# Altium PCB PCB-vitor-project.PcbDoc
Units mil, origin at the board's own origin, x right, y up, seen from the top; angles counter-clockwise.
Board outline 3190 x 2265 mil, 2 copper layers (Top Layer, Bottom Layer); 43 components, 23 nets, 122 pads, 1 vias.
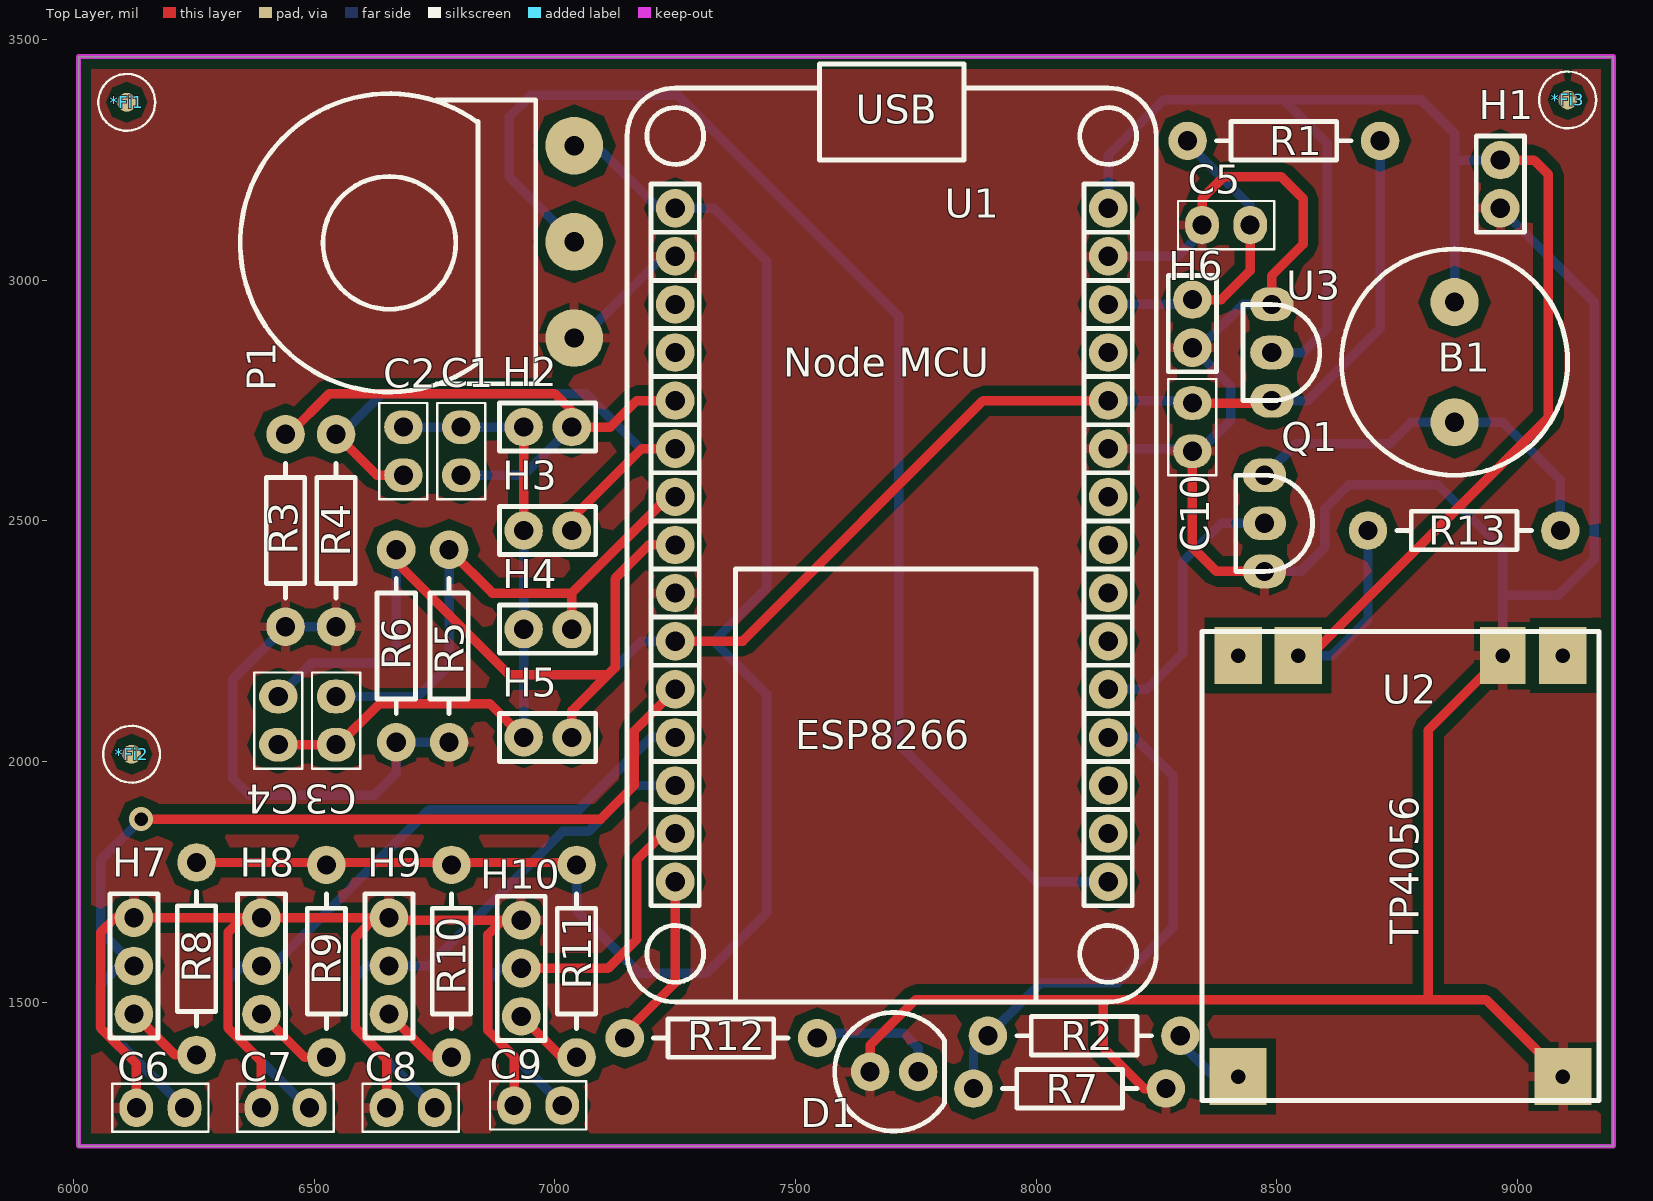
[diagram p0: Top Layer view]
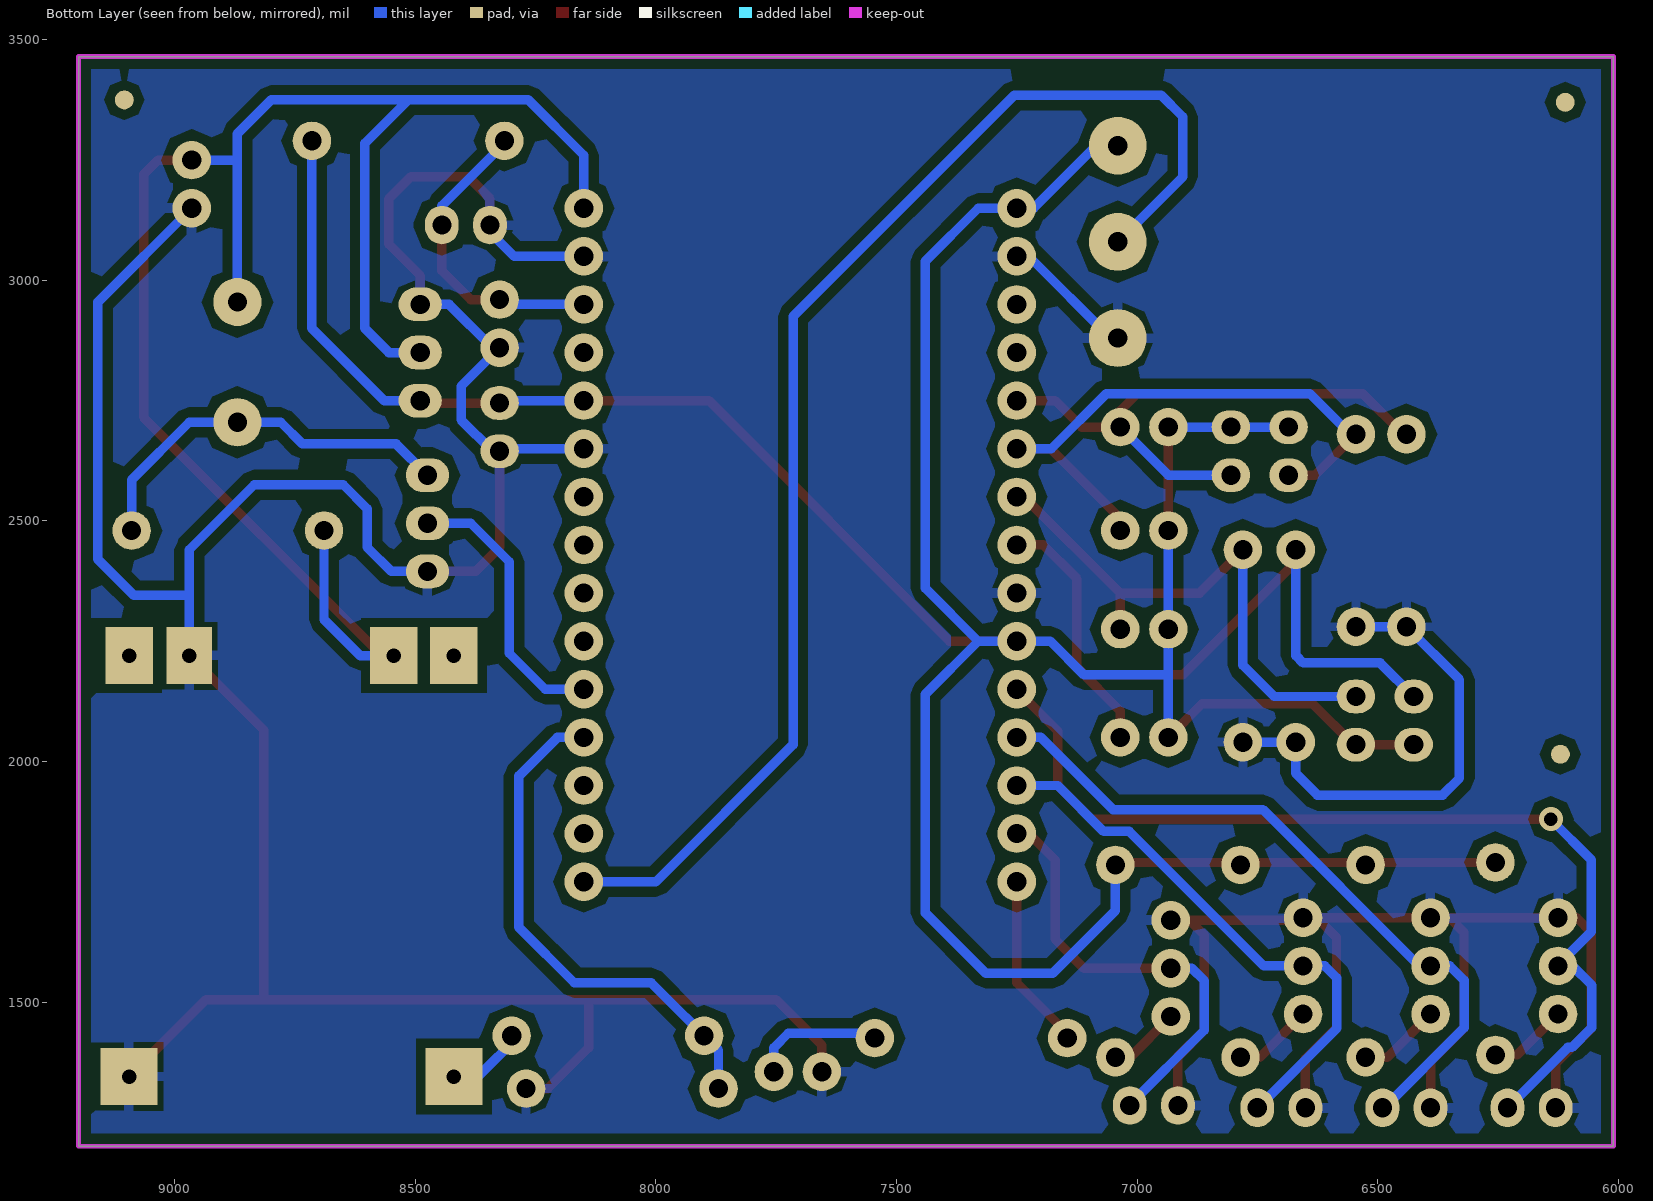
[diagram p1: Bottom Layer view, seen from below]
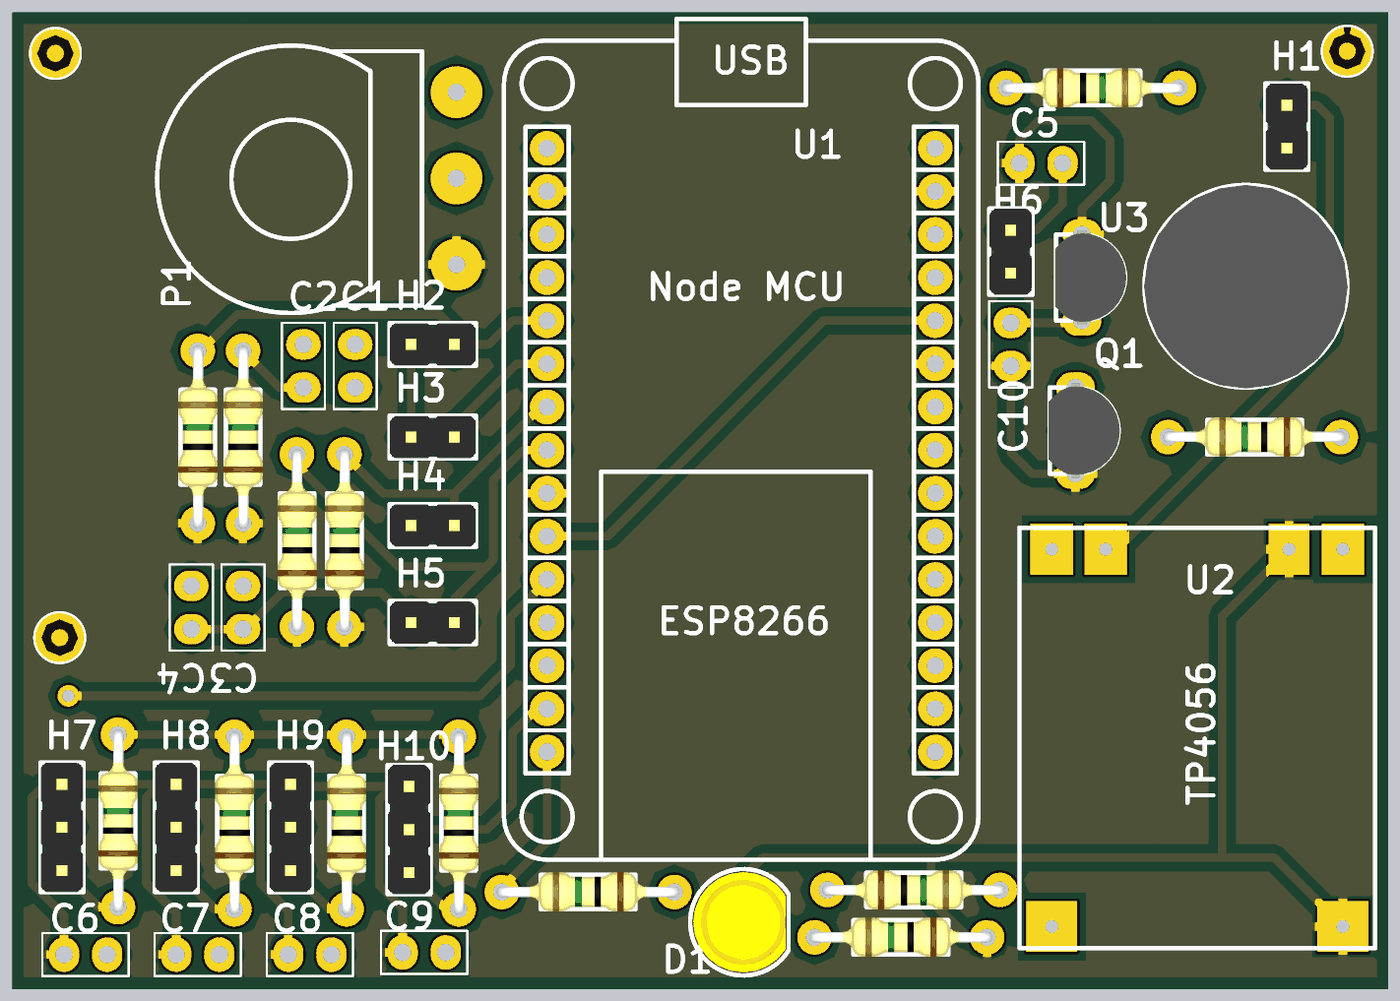
[diagram p2: 3D render of the assembled board from above, using the file's embedded part models]

## Layer stack, top to bottom
Top Solder: solder mask 0.4, Solder Resist, Dk 3.5
Top Layer: signal copper 1.4
Dielectric 1: dielectric 12.6, FR-4, Dk 4.8
Bottom Layer: signal copper 1.4
Bottom Solder: solder mask 0.4, Solder Resist, Dk 3.5

## Board outline
6010,1200 6010,3465 9200,3465 9200,1200

## Design rules (kind name [scope] priority, off if disabled: settings)
Clearance [All] p1: gap=19.68
PolygonConnect [All] p1: connectstyle=Relief reliefconductorwidth=19.68 reliefentries=4 polygonreliefangle="90 Angle" airgapwidth=11.81
RoutingVias [All] p1: holewidth=28 width=50 viastyle="Through Hole" minholewidth=28 minwidth=50 maxholewidth=28 maxwidth=50
SMDToCorner [All] p1: distance=0
SolderMaskExpansion [All] p1: expansion=5.91
Width [All] p1: maxlimit=31.5 minlimit=19.68 preferedwidth=23.62
29 further rules are at their usual default settings.

## Components (designator, comment, footprint, x,y, rotation, side; value= is the part's Value field where it differs from the comment)
*Fi1 "Fiducial" Fiducial 6110,3370 r0 top
*Fi2 "Fiducial" Fiducial 6120,2015 r90 top
*Fi3 "Fiducial" Fiducial 9105,3375 r90 top
B1 "Buzzer" Buzzer 8870,2705 r90 top
C1 "Cap" "Cap 100" 6805,2695 r270 top
C2 "Cap" "Cap 100" 6685,2695 r270 top
C3 "Cap" "Cap 100" 6545,2035 r90 top
C4 "Cap" "Cap 100" 6425,2035 r90 top
C5 "Cap" "Cap 100" 8445,3115 r180 top
C6 "Cap" "Cap 100" 6230,1280 r180 top
C7 "Cap" "Cap 100" 6490,1280 r180 top
C8 "Cap" "Cap 100" 6750,1280 r180 top
C9 "Cap" "Cap 100" 7015,1285 r180 top
C10 "Cap" "Cap 100" 8325,2745 r270 top
D1 "LED" "LED 5mm" 7655,1355 r180 top
H1 "Header 2x1" "Header 2x1" 8965,3150 r90 top
H2 "Header 2x1" "Header 2x1" 6935,2695 r0 top
H3 "Header 2x1" "Header 2x1" 6935,2480 r0 top
H4 "Header 2x1" "Header 2x1" 6935,2275 r0 top
H5 "Header 2x1" "Header 2x1" 6935,2050 r0 top
H6 "Header 2x1" "Header 2x1" 8325,2960 r270 top
H7 "Header 3x1" "Header 3x1" 6125,1475 r90 top
H8 "Header 3x1" "Header 3x1" 6390,1475 r90 top
H9 "Header 3x1" "Header 3x1" 6655,1475 r90 top
H10 "Header 3x1" "Header 3x1" 6930,1470 r90 top
P1 "Potenciômetro" "Potenciometro Vertical" 7040,2880 r90 top
Q1 "BC548" TO-92 8475,2595 r0 top
R1 "Resistor" "Resistor 1/4W" 8315,3290 r0 top
R2 "Resistor" "Resistor 1/4W" 7900,1430 r0 top
R3 "Resistor" "Resistor 1/4W" 6440,2280 r90 top
R4 "Resistor" "Resistor 1/4W" 6545,2280 r90 top
R5 "Resistor" "Resistor 1/4W" 6780,2040 r90 top
R6 "Resistor" "Resistor 1/4W" 6670,2040 r90 top
R7 "Resistor" "Resistor 1/4W" 8270,1320 r180 top
R8 "Resistor" "Resistor 1/4W" 6255,1390 r90 top
R9 "Resistor" "Resistor 1/4W" 6525,1385 r90 top
R10 "Resistor" "Resistor 1/4W" 6785,1385 r90 top
R11 "Resistor" "Resistor 1/4W" 7045,1385 r90 top
R12 "Resistor" "Resistor 1/4W" 7545,1425 r180 top
R13 "Resistor" "Resistor 1/4W" 9090,2480 r180 top
U1 "Node MCU" "Node MCU" 7250,3150 r0 top
U2 "TP4056" TP4056 9145,1270 r90 top
U3 "MCP1700" TO-92 8490,2950 r0 top

## Footprints (in the part's own frame and the unit in brackets; to place one, negate y for a bottom-side part, rotate by r counter-clockwise, add the part's x,y. Pads: shape width x height; smd on the part's side, far side on the other; paste and mask are expansions set on the pad)
Buzzer [mil]
  round 100 hole 40: 1(0,0) 2(250,0)
  silkscreen extent -110,-235 360,235, body extent -112,-236 360,236, height 339
"Cap 100" [mil]
  oval 70x80 hole 40: 1(0,0) 2(100,0)
  silkscreen extent -50,-50 150,50
Fiducial [mm]
  round 1 all layers, no hole mask+1: 1(0,0)
  silkscreen extent -1.5,-1.5 1.5,1.5
"Header 2x1" [mil]
  round 80 hole 40: 1(0,0) 2(100,0)
  silkscreen extent -50,-50 150,50, body extent -50,-49 150,49, height 336
"Header 3x1" [mil]
  round 80 hole 40: 1(0,0) 2(100,0) 3(200,0)
  silkscreen extent -50,-50 250,50, body extent -50,-49 250,49, height 336
"LED 5mm" [mil]
  round 80 hole 40: 1(0,0) 2(-100,0)
  silkscreen extent -155,-123 73,123, body extent -148,-116 66,116, height 344
"Node MCU" [mil]
  round 80 hole 40: 1(0,0) 2(0,-100) 3(0,-200) 4(0,-300) 5(0,-400) 6(0,-500) 7(0,-600) 8(0,-700) 9(0,-800) 10(0,-900) 11(0,-1000) 12(0,-1100) 13(0,-1200) 14(0,-1300) 15(0,-1400) 16(900,-1400) 17(900,-1300) 18(900,-1200) 19(900,-1100) 20(900,-1000) 21(900,-900) 22(900,-800) 23(900,-700) 24(900,-600) 25(900,-500) 26(900,-400) 27(900,-300) 28(900,-200) 29(900,-100) 30(900,0)
  silkscreen extent -100,-1650 1000,300
"Potenciometro Vertical" [mil]
  round 120 hole 40: 1(0,0) 2(200,0) 3(400,0)
  silkscreen extent -112,80 508,694
"Resistor 1/4W" [mil]
  round 80 hole 40: 1(0,0) 2(400,0)
  silkscreen extent 60,-40 340,40, body extent -12,-46 412,45, height 90
TO-92 [mil]
  oval 90x70 hole 40: 1(0,0) 2(0,-100) 3(0,-200)
  silkscreen extent -60,-200 100,0, body extent -63,-210 103,10, height 394
TP4056 [mm]
  rect 3x3 hole 0.762: 1(1.905,18.415) 2(1.905,1.27)
  rect 3x2.5 hole 0.762: 3(24.13,18.415) 4(24.13,15.24) 6(24.13,1.27)
  rect 3x2.4 hole 0.762: 5(24.13,4.445)
  silkscreen extent 0.63,-0.64 25.4,20.32

## Part data
*Fi1 *Fi2 *Fi3: "Fiduciais para montagem em pick n' place"
Q1: "Transistor NPN"
U3: "LDO Voltage Regulator"

## Via types
v1: diameter 50, hole 28, Top Layer to Bottom Layer, 1 vias

## Nets (pads, with @x,y where several pads share a name; then routed paths per layer and width w, separated by ;. In a path a pad name is that pad's centre, name@x,y a point inside that pad or via, vN(x,y) a via of type N, cw(c..) or ccw(c..) an arc to the next point about the centre after c; other vN are vias at no path point)
3V3: C1.1 C2.1 C3.1 C4.1 C10.1 H2.1 H3.1 H4.1 H5.1 P1.3 R1.2 R8.2 R9.2 R10.2 R11.2 U1.1 U1.10 U1.26 U3.3 | length 7350.7
  Top Layer w19.68: R8.2 R11.2@7040,1790 ; C4.1@6430,2035 6550,2035 6635,2120 6865,2120 H5.1 ; H3.1 H2.1 ; U1.10 7390,2250 7890,2750 U1.26 ; C10.1 8485,2745 U3.3
  Bottom Layer w19.68: C2.1 C1.1 H2.1 ; H5.1 6935,2180 ; H3.1 H4.1 6935,2180 ; P1.3 7085,3280 7215,3150 U1.1 7330,3150 7440,3040 7440,2360 7330,2250 ; R11.2 7045,1690 7175,1560 7315,1560 7440,1685 7440,2140 7330,2250 ; U1.26 C10.1@8320,2750 ; U3.3@8475,2750 U3.3 8565,2750 8715,2900 R1.2 ; 6935,2180 7110,2180 7180,2250 U1.10 7330,2250
BT1: C1.2 H2.2 R3.2 U1.5 | length 1188
  Top Layer w19.68: R3.2 6446.67,2680 6531.2,2764.53 6999.53,2764.53 7035,2729.05 H2.2 7115,2695 7170,2750 U1.5
  Bottom Layer w19.68: C1.2 6935,2595 H2.2
BT2: C2.2 H3.2 R4.2 U1.6 | length 1262.7
  Top Layer w19.68: R4.2 6630,2595 C2.2 ; H3.2 7035,2505 7180,2650 U1.6
  Bottom Layer w19.68: R4.2 6556.67,2680 6641.2,2764.53 7063.8,2764.53 7178.33,2650 U1.6
BT3: C3.2 H4.2 R5.2 U1.7 | length 1167
  Top Layer w19.68: R5.2 6870,2350 7035,2350 ; H4.2 7035,2350 ; U1.7 7235,2550 7035,2350
  Bottom Layer w19.68: C3.2 6715,2135 6780,2200 R5.2
BT4: C4.2 H5.2 R6.2 U1.8 | length 1583.8
  Top Layer w19.68: R6.2 6670,2415 6905,2180 7110,2180 ; H5.2 7035,2105 7125,2195 7125,2380 7195,2450 U1.8
  Bottom Layer w19.68: C4.2 6495,2205 6655,2205 6670,2220 R6.2
BUZZER: Q1.2 U1.20 | length 579.2
  Bottom Layer w19.68: U1.20 8230,2150 8305,2225 8305,2415 8385,2495 Q1.2
CH1: C6.1 H7.2 U1.11 | length 2070.7
  Top Layer w19.68: v1(6140,1880) 7095,1880 7165,1950 7165,2063.33 7235,2133.33 U1.11@7235,2150
  Bottom Layer w19.68: v1(6140,1880) 6055.47,1795.47 6055.47,1646.2 6125,1576.67 H7.2 6095,1575 6055,1535 6055,1446.67 6096.2,1405.47 6104.53,1405.47 C6.1
CH2: C7.1 H8.2 U1.12 | length 1476.5
  Bottom Layer w19.68: C7.1 6486.67,1280 6320,1446.67 6320,1545 6350,1575 H8.2 6413.33,1575 6738.33,1900 7050,1900 7200,2050 U1.12
CH3: C8.1 H9.2 U1.13 | length 1169
  Bottom Layer w19.68: C8.1 6585,1445 6585,1550 6610,1575 H9.2 6736.67,1575 7016.2,1854.53 7069.53,1854.53 7165,1950 U1.13
CH4: C9.1 H10.2 U1.14 | length 936.2
  Top Layer w19.68: H10.2 7110,1570 7170,1630 7170,1795 7225,1850 U1.14
  Bottom Layer w19.68: H10.2 6885.94,1570 6860.47,1544.53 6860.47,1441.2 7015,1286.67 C9.1
CHARGING?: R2.1 R7.2 U1.19 | length 1083.8
  Bottom Layer w19.68: R7.2 7870,1400 8010,1540 8170,1540 8285,1655 8285,1970 8205,2050 U1.19
GND: C5.2 C6.2 C7.2 C8.2 C9.2 C10.2 D1.1 H1.1 H6.2 H7.3 H8.3 H9.3 H10.3 P1.1 Q1.3 R3.1 R4.1 R5.1 R6.1 R7.1 U1.2 U1.9 U1.25 U1.29 U2.2 U2.5 U3.1 | length 10228.4
  Top Layer w19.68: H7.3@6085.94,1675 6055.47,1644.53 6055.47,1446.2 6130,1371.67 C6.2 ; H7.3@6125,1670 6130,1675 H8.3@6350.94,1675 ; C7.2 6390,1376.67 6320.47,1446.2 6320.47,1644.53 H8.3@6350.94,1675 ; C8.2 6650,1381.67 6585.47,1446.2 6585.47,1634.16 H9.3@6626.31,1675 ; H9.3 H9.3@6650,1675 ; C9.2 6915,1386.67 6860.47,1441.2 6860.47,1639.53 H10.3@6890.94,1670 ; H10.3 H10.3@6890.94,1670 ; D1.1@7655,1340 7655,1410 7750,1505 8935,1505 U2.2 ; 8140,1505 8140,1405 8225,1320 R7.1 ; C10.2 8325,2445 8375,2395 Q1.3 ; C5.2 8345,3170 8390,3215 8510,3215 8555,3170 8555,3075 8490,3010 U3.1 ; 8815,1505 8815,2065 U2.5 ; H8.3@6350.94,1675 H8.3 H9.3@6626.31,1675 ; H9.3@6626.31,1675 H9.3@6650,1675 ; H9.3@6650,1675 6655,1670 H10.3@6890.94,1670
  Bottom Layer w19.68: R4.1 R3.1 6330,2170 6330,1965 6365,1930 6625,1930 6670,1975 R6.1 R5.1 ; P1.1@7035,2875 P1.1 7055,2880 7225,3050 U1.2 ; U1.25 8320,2650 C10.2 8340,2645 8405,2710 8405,2780 H6.2 8340,2860 8430,2950 U3.1@8475,2950 ; U1.29 8295,3050 C5.2@8345,3100 ; Q1.3@8469.97,2395 Q1.3 8550,2395 8600,2445 8600,2525 8650,2575 8835,2575 8970,2440 U2.5 ; H1.1 9160,2955 9160,2420 9085,2345 8970,2345
LED: R12.2 U1.15 | length 368.5
  Top Layer w19.68: R12.2@7145,1435 7250,1540 U1.15
  Bottom Layer w19.68: R12.2 R12.2@7145,1435
NetB1_1: B1.1 Q1.1 R13.1 | length 815.3
  Bottom Layer w19.68: Q1.1 8540,2660 8735,2660 8780,2705 B1.1 8970,2705 9090,2585 R13.1
NetD1_2: D1.2 R12.1 | length 315.7
  Bottom Layer w19.68: R12.1@7525,1415 7545,1435 7725,1435 7755,1405 D1.2@7755,1340
NetH7_1: H7.1 R8.1 | length 165.2
  Top Layer w19.68: H7.1 6210,1390 R8.1
NetH8_1: H8.1 R9.1 | length 172.3
  Top Layer w19.68: H8.1 6480,1385 R9.1
NetH9_1: H9.1 R10.1 | length 167.3
  Top Layer w19.68: H9.1 6745,1385 R10.1
NetH10_1: H10.1 R11.1 | length 150.2
  Top Layer w19.68: H10.1 7015,1385 R11.1
NetR2_2: R2.2 U2.1 | length 200.2
  Bottom Layer w19.68: R2.2@8280,1430 8285,1430 8370,1345 U2.1@8445,1345
POT: P1.2 U1.16 | length 2778.1
  Bottom Layer w19.68: P1.2 6905,3215 6905,3340 6950,3385 7255,3385 7715,2925 7715,2035 8000,1750 U1.16
RST: C5.1 H6.1 R1.1 U1.28 | length 662.8
  Top Layer w19.68: H6.1 8385,2960 8445,3020 C5.1
  Bottom Layer w19.68: U1.28 8315,2950 H6.1 ; R1.1 8315,3285 8445,3155 C5.1 C5.1@8445,3100
VBAT: B1.2 H1.2 R13.2 U1.30 U2.4 U3.2 | length 3690.2
  Top Layer w19.68: U2.4@8570,2220 9065,2715 9065,3220 9035,3250 H1.2
  Bottom Layer w19.68: U1.30 8150,3260 8265,3375 8800,3375 8870,3305 8870,3255 ; U3.2@8475,2850 8555,2850 8605,2900 8605,3285 8515,3375 ; U2.4@8570,2220 8615,2220 8690,2295 R13.2 R13.2@8690,2500 ; B1.2 8870,3255 ; H1.2 8875,3250 8870,3255
pads on no net: *Fi1.1 *Fi2.1 *Fi3.1 U1.3 U1.4 U1.17 U1.18 U1.21 U1.22 U1.23 U1.24 U1.27 U2.3 U2.6

## Polygon pours and split planes (outlines as drawn)
GND on Top Layer "Top Layer-GND" (solid, pour order 2): 9200,3465 6015,3465 6015,1205 6010,1200 9195,1200 9195,3460 9200,3465
GND on Bottom Layer "Bot Layer-GND" (solid, pour order 4): 6010,3465 9200,3465 9200,1215 9190,1205 9185,1200 6010,1200 6010,3455 6020,3465

## Keep-outs
Keep-Out Layer:
  lines w10: 6010,1200 9200,1200 9200,3340 9200,3465 6010,3465 6010,1200

## Text inside footprints (layer, text, board x,y; h text height)
U1: Top Overlay "USB" at 7625,3325 h60; Top Overlay "ESP8266" at 7500,2025 h60